# EAGLE board SpaceInvaders-OtherMill-TopOnly (EAGLE 8.0.0)
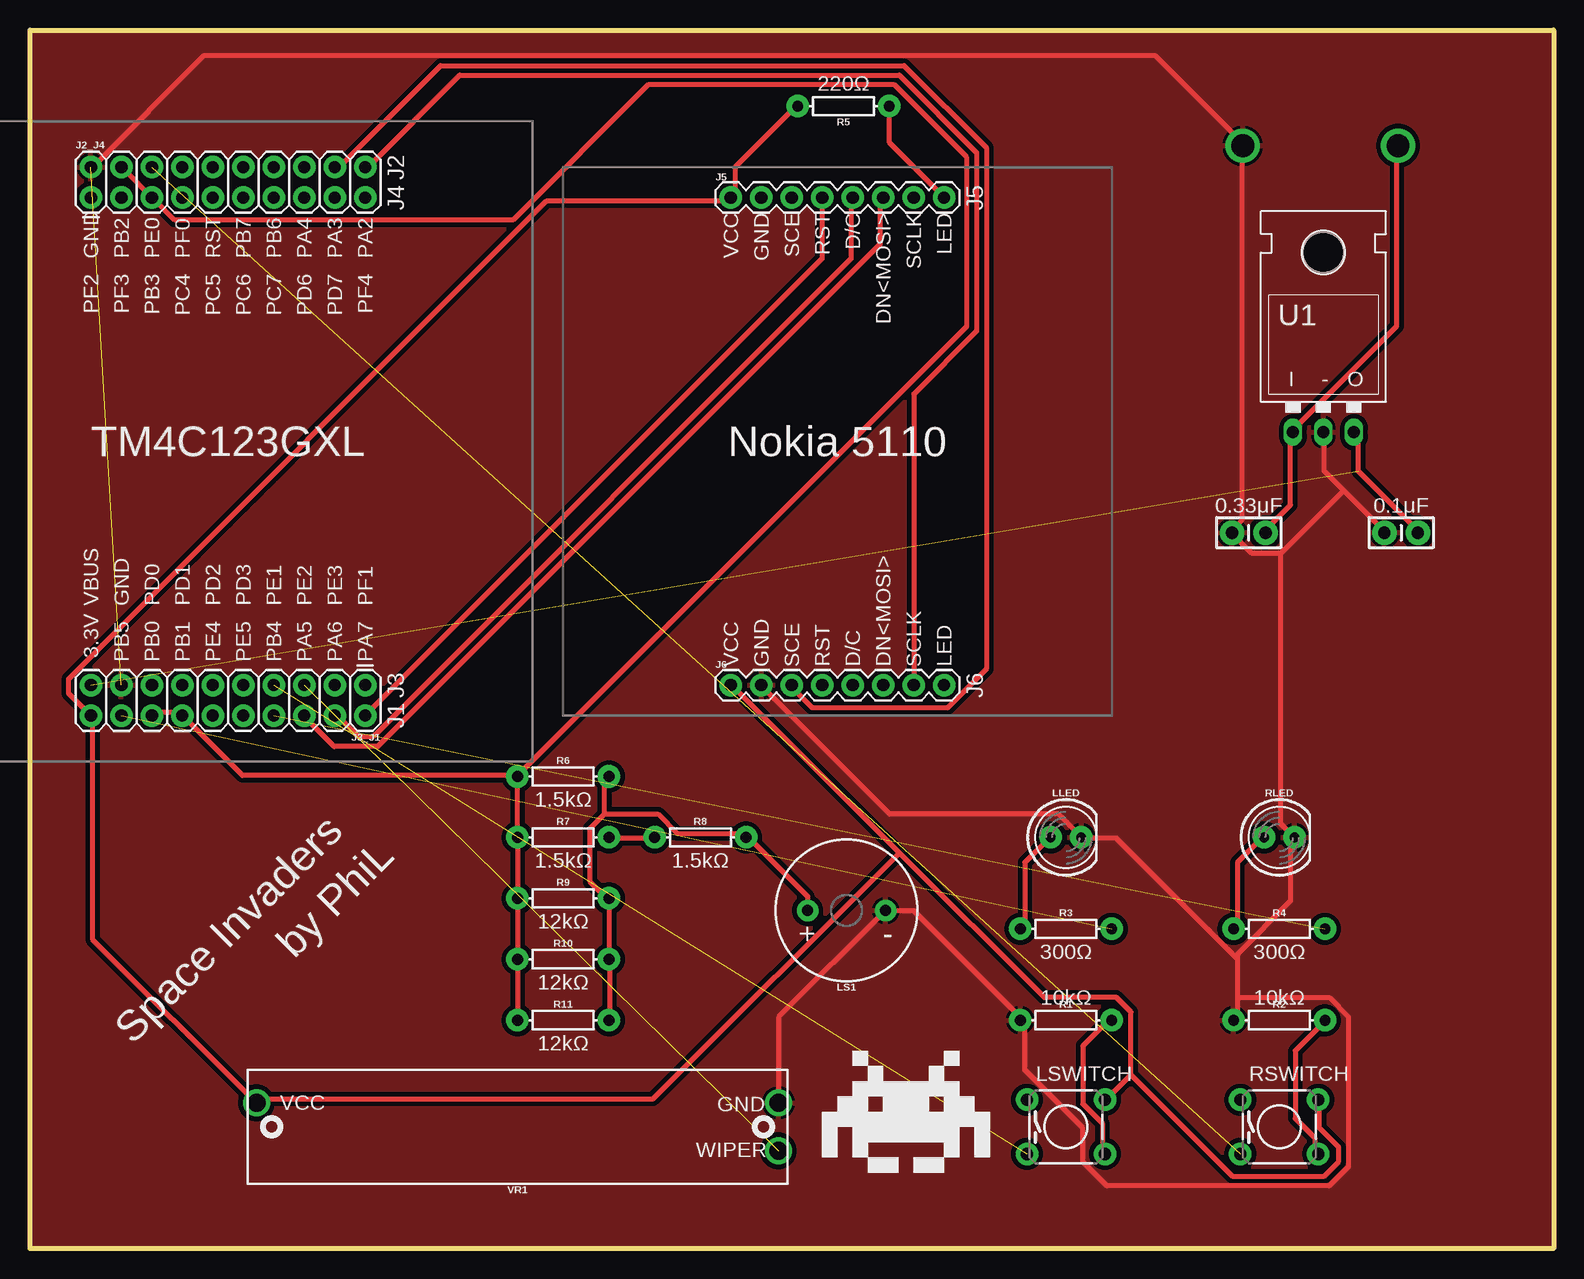
[diagram p0: board, top side]
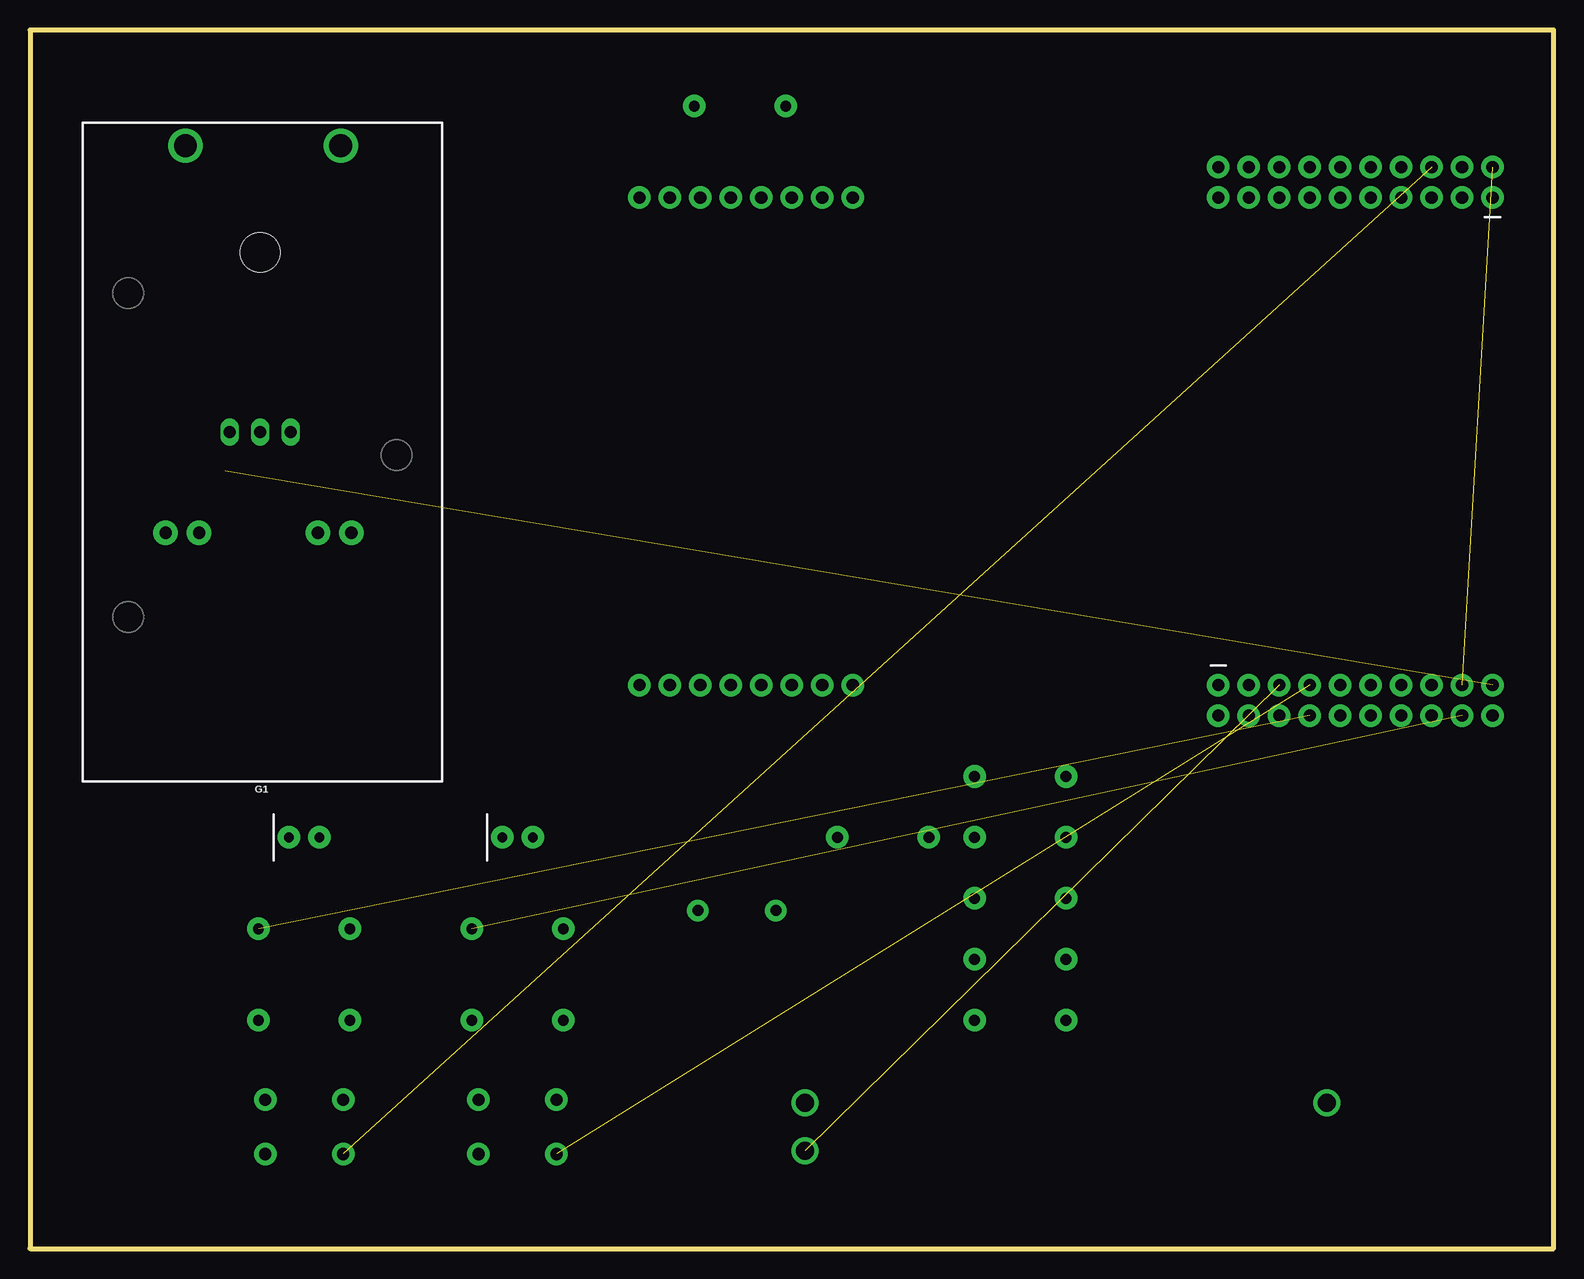
[diagram p1: board, bottom side, seen from below]

Size 127 x 101.6 mm. Coordinates in mm from the lower left corner, seen from the top.
Outline: 0,0 0,101.6 127,101.6 127,0 0,0
Copper layers (1*16): Top 0.035mm / dielectric 1.5mm / Bottom 0.035mm
Design rules "OthermillDRC_1_64_v2": minimum track width 16mil, minimum drill 31mil, track to track 0.39878125mm, track to pad 0.39878125mm, pad to pad 0.39878125mm, via to via 0.39878125mm, smd to smd 0mil, copper to edge 0mil, drill to drill 1mil, minimum pad ring 0mil, minimum via ring 15mil, stop-mask expansion 1mil, vias tented up to drill 30mil, thermal gap 10mil

## Footprints (pad centres in the part's own frame; a part is rotated, then mirrored left to right if it is on the bottom)
CAP-PTH-SMALL-KIT = drill 1.016 pad 2.032: 1 -1.397,0; 2 1.397,0
BATTCON_9V = drill 1.905: + 0,0; - 0,-12.954
2X10 = drill 1.016 pad 1.88: 1 0,0; 2 0,2.54; 3 2.54,0; 4 2.54,2.54; 5 5.08,0; 6 5.08,2.54; 7 7.62,0; 8 7.62,2.54; 9 10.16,0; 10 10.16,2.54; 11 12.7,0; 12 12.7,2.54; 13 15.24,0; 14 15.24,2.54; 15 17.78,0; 16 17.78,2.54; 17 20.32,0; 18 20.32,2.54; 19 22.86,0; 20 22.86,2.54
1X08 = drill 1.016 pad 1.88: 1 0,0; 2 2.54,0; 3 5.08,0; 4 7.62,0; 5 10.16,0; 6 12.7,0; 7 15.24,0; 8 17.78,0
LED_5MM = drill 0.813 pad 1.88: A -1.27,0; K 1.27,0
BUZZER-12MM = drill 0.9 pad 1.778: + 3.25,0; - -3.25,0
TACTILE-PTH = drill 1.016 pad 1.88: 1 -3.251,2.261; 2 3.251,2.261; 3 -3.251,-2.261; 4 3.251,-2.261
AXIAL-0.3 = drill 0.9 pad 1.88: P$1 -3.81,0; P$2 3.81,0
TO-220-ALT = drill 1.016 long: GND 0,-3.81; IN -2.54,-3.81; OUT 2.54,-3.81 | hole 3.302: 0,11.176
SLIDER-MEDIUM = drill 1.5: BOTTOM 21.75,-2; TOP -21.75,-2; WIPER -21.75,2

## Placement (x,y rotation side)
C1  0.1μF  [CAP-PTH-SMALL-KIT]  114.3,59.69 0 top
C2  0.33μF  [CAP-PTH-SMALL-KIT]  101.6,59.69 180 top
FRAME1  FRAME-LETTER  [CREATIVE_COMMONS]  30.48,-8.89 0 top  (outside the outline)
G1  9V  [BATTCON_9V]  114.05,91.95 90 bottom
J2_J4  TM4C123GXL  [2X10]  5.08,87.63 0 top
J3_J1  TM4C123GXL  [2X10]  27.94,46.99 180 top
J5  Nokia 5110  [1X08]  58.42,87.63 0 top
J6  Nokia 5110  [1X08]  58.42,46.99 0 top
LLED  YELLOW  [LED_5MM]  86.36,34.29 0 top
LS1  BUZZER-PTH  [BUZZER-12MM]  68.07,28.19 180 top
LSWITCH  TACTILE  [TACTILE-PTH]  86.36,10.16 0 top
R1  10kΩ  [AXIAL-0.3]  86.36,19.05 0 top
R2  10kΩ  [AXIAL-0.3]  104.14,19.05 0 top
R3  300Ω  [AXIAL-0.3]  86.36,26.67 0 top
R4  300Ω  [AXIAL-0.3]  104.14,26.67 0 top
R5  220Ω  [AXIAL-0.3]  67.82,95.25 180 top
R6  1.5kΩ  [AXIAL-0.3]  44.45,39.37 0 top
R7  1.5kΩ  [AXIAL-0.3]  44.45,34.29 0 top
R8  1.5kΩ  [AXIAL-0.3]  55.88,34.29 0 top
R9  12kΩ  [AXIAL-0.3]  44.45,29.21 0 top
R10  12kΩ  [AXIAL-0.3]  44.45,24.13 0 top
R11  12kΩ  [AXIAL-0.3]  44.45,19.05 0 top
RLED  RED  [LED_5MM]  104.14,34.29 0 top
RSWITCH  TACTILE  [TACTILE-PTH]  104.14,10.16 0 top
U1  5V Voltage Regulator  [TO-220-ALT]  107.82,71.88 0 top
VR1  10kΩ  [SLIDER-MEDIUM]  40.64,10.16 180 top

## Library data of the parts
C1 C2 = SparkFun-Capacitors; PROD_ID: CAP-08370
FRAME1 = SparkFun-Aesthetics
G1 = SparkFun-Batteries; PROD_ID: BATT-10855
J2_J4 J3_J1 = SparkFun-Connectors
J5 J6 = SparkFun-Connectors; PROD_ID: CONN-08438
LLED RLED = SparkFun-LED
LS1 = SparkFun-Electromechanical; PROD_ID: COMP-08253; SF_SKU: COM-07950
LSWITCH RSWITCH = SparkFun-Retired
R1 R2 = SparkFun-Resistors; PROD_ID: RES-09435
R3-R11 = SparkFun-Resistors; PROD_ID: RES-08380
U1 = SparkFun-IC-Power; PROD_ID: VREG-08450; SF_ID: COM-00107
VR1 = SparkFun-Resistors; PROD_ID: RES-11931; SF_SKU: COM-11621

## Nets
3.3V: J3_J1.20 J5.1 J6.1 LSWITCH.2 R5.P$2 RSWITCH.2 VR1.BOTTOM
9V: C2.1 G1.+ U1.IN
GND: C1.1 C2.2 G1.- J2_J4.2 J3_J1.17 J6.2 LLED.K LS1.- R1.P$1 R2.P$1 RLED.K U1.GND VR1.TOP
LED: J5.8 R5.P$1
N$1: R7.P$2 R8.P$1
N$12: LSWITCH.4 R1.P$2
N$14: R2.P$2 RSWITCH.4
N$17: R4.P$1 RLED.A
N$19: LLED.A R3.P$1
N$23: LS1.+ R6.P$2 R8.P$2 R9.P$2 R10.P$2 R11.P$2
PA2: J2_J4.20 J6.7
PA3: J2_J4.18 J6.3
PA5: J3_J1.6 J5.6
PA6: J3_J1.4 J5.5
PA7: J3_J1.2 J5.4
PB2: J2_J4.4 J2_J4.5 J3_J1.14 J3_J1.16 R6.P$1 R7.P$1 R9.P$1 R10.P$1 R11.P$1
PB4: J3_J1.8 R4.P$2
PB5: J3_J1.18 R3.P$2
PE0: J2_J4.6 RSWITCH.3
PE1: J3_J1.7 LSWITCH.3
PE2: J3_J1.5 VR1.WIPER
VBUS: C1.2 J3_J1.19 U1.OUT

## Tracks (layer width: path | path; a pad name or v marks a point on that pad's centre or on a via)
3.3V
  Top 0.406: 72.47,33.01 84.54,20.93 90.58,20.93 91.79,19.73 91.79,14.49 | 72.47,33.01 58.78,46.7 J6.1 | 91.79,14.49 89.78,12.48 LSWITCH.2 | 91.79,14.49 100.25,6.04 107.89,6.04 109.1,7.25 109.1,8.45 107.49,10.06 107.49,12.08 RSWITCH.2 | R5.P$2 63.61,95.01 58.78,90.18 58.78,87.77 J5.1 58.38,87.36 43.08,87.36 3.22,47.51 3.22,46.3 4.83,44.69 J3_J1.20 5.23,44.28 5.23,25.77 18.52,12.48 VR1.BOTTOM 18.92,12.48 51.93,12.48 72.47,33.01
9V
  Top 0.406: C2.1 103.06,59.99 105.08,62 105.08,68.04 U1.IN 105.48,68.44 113.93,76.89 113.93,91.79 G1.+
GND  (1 unrouted)
  Top 0.406: J2_J4.2 5.23,90.18 14.49,99.44 93.8,99.44 101.05,92.19 G1.- 101.05,91.79 101.05,60.79 100.25,59.99 C2.2 100.25,59.58 101.86,57.97 104.27,57.97 | VR1.TOP 62.4,12.48 62.4,19.32 71.26,28.18 LS1.- 71.66,28.18 73.67,28.18 82.53,19.32 R1.P$1 82.93,18.92 82.93,14.9 87.77,10.06 87.77,7.25 89.78,5.23 108.3,5.23 109.91,6.84 109.91,19.32 108.3,20.93 100.65,20.93 | 109.5,63.21 112.72,59.99 C1.1 | 109.5,63.21 107.89,64.82 107.89,68.04 U1.GND | 109.5,63.21 104.27,57.97 | 100.65,24.16 100.65,24.56 105.08,28.99 105.08,34.22 RLED.K 105.08,34.62 104.27,35.43 104.27,57.97 | 100.65,24.16 100.65,20.93 | 100.65,20.93 100.65,19.32 R2.P$1 | 100.65,24.16 90.58,34.22 87.77,34.22 LLED.K 87.36,34.62 85.75,36.23 71.66,36.23 61.19,46.7 J6.2
  pour Top: 0,101.6 127,101.6 127,0 0,0
LED
  Top 0.406: R5.P$1 71.66,95.01 71.66,92.19 76.09,87.77 J5.8
N$1
  Top 0.406: R7.P$2 48.31,34.22 51.93,34.22 R8.P$1
N$12
  Top 0.406: LSWITCH.4 89.38,8.05 89.38,10.47 87.77,12.08 87.77,16.91 89.78,18.92 R1.P$2
N$14
  Top 0.406: RSWITCH.4 107.09,8.05 107.09,9.26 105.48,10.87 105.48,16.51 107.89,18.92 R2.P$2
N$17
  Top 0.406: R4.P$1 100.65,26.97 100.65,32.21 102.66,34.22 RLED.A
N$19
  Top 0.406: R3.P$1 82.93,26.97 82.93,32.21 84.95,34.22 LLED.A
N$23
  Top 0.406: LS1.+ 64.82,28.58 64.82,29.39 59.99,34.22 R8.P$2 59.58,34.62 53.95,34.62 52.34,36.23 47.91,36.23 | R11.P$2 48.31,19.32 48.31,23.75 R10.P$2 48.31,24.16 48.31,28.99 R9.P$2 47.91,29.39 46.7,30.6 46.7,35.02 47.91,36.23 | 47.91,36.23 47.91,39.05 R6.P$2
PA2
  Top 0.406: J6.7 73.67,47.1 73.67,71.26 78.91,76.49 78.91,91.39 72.47,97.83 35.83,97.83 28.18,90.18 J2_J4.20
PA3
  Top 0.406: J6.3 63.61,46.7 65.22,45.09 76.49,45.09 79.71,48.31 79.71,91.79 72.87,98.64 34.22,98.64 25.77,90.18 J2_J4.18
PA5
  Top 0.406: J3_J1.6 22.95,44.28 25.36,41.87 28.99,41.87 70.86,83.74 70.86,87.36 J5.6
PA6
  Top 0.406: J3_J1.4 25.77,44.28 27.38,42.67 28.58,42.67 68.44,82.53 68.44,87.36 J5.5
PA7
  Top 0.406: J3_J1.2 28.18,44.69 66.03,82.53 66.03,87.36 J5.4
PB2
  Top 0.406: J2_J4.4 7.65,89.78 8.05,89.78 10.06,87.77 J2_J4.5 10.47,87.36 12.08,85.75 40.26,85.75 51.53,97.02 72.06,97.02 78.1,90.98 78.1,76.89 40.66,39.45 R6.P$1 | R11.P$1 40.66,19.32 40.66,23.75 R10.P$1 40.66,24.16 40.66,28.99 R9.P$1 40.66,29.39 40.66,34.22 R7.P$1 40.66,34.62 40.66,39.05 R6.P$1 | J3_J1.16 10.47,44.69 12.48,44.69 J3_J1.14 12.88,44.28 17.71,39.45 40.26,39.45 R6.P$1
PB4  (1 unrouted)
PB5  (1 unrouted)
PE0  (1 unrouted)
PE1  (1 unrouted)
PE2  (1 unrouted)
VBUS  (1 unrouted)
  Top 0.406: U1.OUT 110.71,68.04 110.71,64.82 115.54,59.99 C1.2

## Text on the board
tPlace: 220Ω | J2 | J4 | J5 | VCC | GND | SCE | RST | D/C | DN<MOSI> | SCLK | LED | GND | PB2 | PE0 | PF0 | RST | PB7 | PB6 | PA4 | PA3 | PA2 | PF2 | PF3 | PB3 | PC4 | PC5 | PC6 | PC7 | PD6 | PD7 | PF4 | I | - | O | TM4C123GXL | Nokia 5110 | 0.33μF | 0.1μF | VBUS | GND | PD0 | PD1 | PD2 | PD3 | PE1 | PE2 | PE3 | PF1 | 3.3V | PB5 | PB0 | PB1 | PE4 | PE5 | PB4 | PA5 | PA6 | PA7 | VCC | GND | SCE | RST | D/C | DN<MOSI> | SCLK | LED | J3 | J6 | J1 | 1.5kΩ | 1.5kΩ | 1.5kΩ | by PhiL | 12kΩ | Space Invaders | + | - | 300Ω | 300Ω | 12kΩ | 10kΩ | 10kΩ | 12kΩ | VCC | GND | WIPER
tDocu: Phi Luu